# EAGLE board PCFX_Contrl_Socket_rev_C (EAGLE 9.6.2)
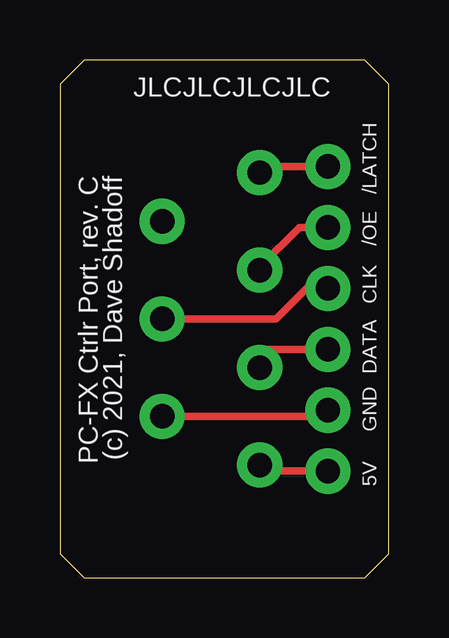
[diagram p0: board, top side]
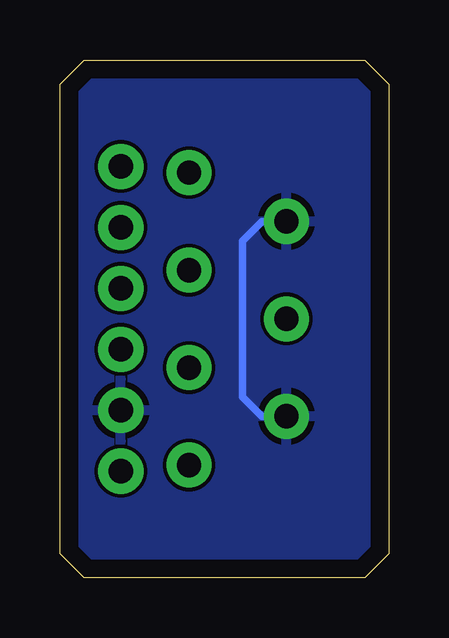
[diagram p1: board, bottom side, seen from below]

Size 13.72 x 21.59 mm. Coordinates in mm from the lower left corner, seen from the top.
Outline: 0,20.59 0,1 1,0 12.72,0 13.72,1 13.72,20.59 12.72,21.59 1,21.59 0,20.59
Copper layers (1*16): Top 0.035mm / dielectric 1.5mm / Bottom 0.035mm
Design rules "default *": minimum track width 6mil, minimum drill 0.35mm, track to track 6mil, track to pad 6mil, pad to pad 6mil, via to via 6mil, smd to smd 6mil, copper to edge 30mil, drill to drill 6mil, minimum pad ring 10mil, minimum via ring 8mil, stop-mask expansion 4mil, vias tented up to drill 18mil, thermal gap 10mil

## Footprints (pad centres in the part's own frame; a part is rotated, then mirrored left to right if it is on the bottom)
1X01_NO_SILK = drill 1.016 pad 1.88: 1 0,0
1X06_NO_SILK = drill 1.016 pad 1.88: 1 0,0; 2 2.54,0; 3 5.08,0; 4 7.62,0; 5 10.16,0; 6 12.7,0

## Placement (x,y rotation side)
J1  [1X01_NO_SILK]  8.33,4.7 0 top
J2  [1X01_NO_SILK]  8.33,8.76 0 top
J3  [1X01_NO_SILK]  8.33,12.83 0 top
J4  [1X01_NO_SILK]  8.33,16.89 0 top
J5  [1X01_NO_SILK]  4.27,6.73 0 top
J6  [1X01_NO_SILK]  4.27,10.79 0 top
J7  [1X01_NO_SILK]  4.27,14.86 0 top
J9  [1X06_NO_SILK]  11.18,17.14 270 top

## Library data of the parts
J1-J7 = SparkFun-Connectors
J9 = SparkFun-Connectors; PROD_ID: CONN-08437

## Nets
GND: J5.1 J7.1 J9.5
N$1: J4.1 J9.1
N$2: J3.1 J9.2
N$3: J6.1 J9.3
N$4: J2.1 J9.4
N$5: J1.1 J9.6

## Tracks (layer width: path | path; a pad name or v marks a point on that pad's centre or on a via)
GND
  Top 0.305: J5.1 10.92,6.73 J9.5
  Bottom 0.305: J7.1 5.28,14.86 6.1,14.05 6.1,7.54 5.28,6.73 J5.1
  pour Bottom: -0.51,-0.25 -0.51,22.1 14.22,22.1 14.22,-0.25
N$1
  Top 0.305: J4.1 8.59,17.14 J9.1
N$2
  Top 0.305: J9.2 9.98,14.61 8.33,12.95 J3.1
N$3
  Top 0.305: J6.1 9.02,10.79 10.29,12.06 J9.3
N$4
  Top 0.305: J9.4 8.71,9.53 8.33,9.14 J2.1
N$5
  Top 0.305: J9.6 8.71,4.45 8.46,4.7 J1.1

## Text on the board
tNames: JLCJLCJLCJLC | PC-FX Ctrlr Port, rev. C | (c) 2021, Dave Shadoff | /LATCH | /OE | CLK | DATA | GND | 5V